# EAGLE board HPF (EAGLE 5.07)
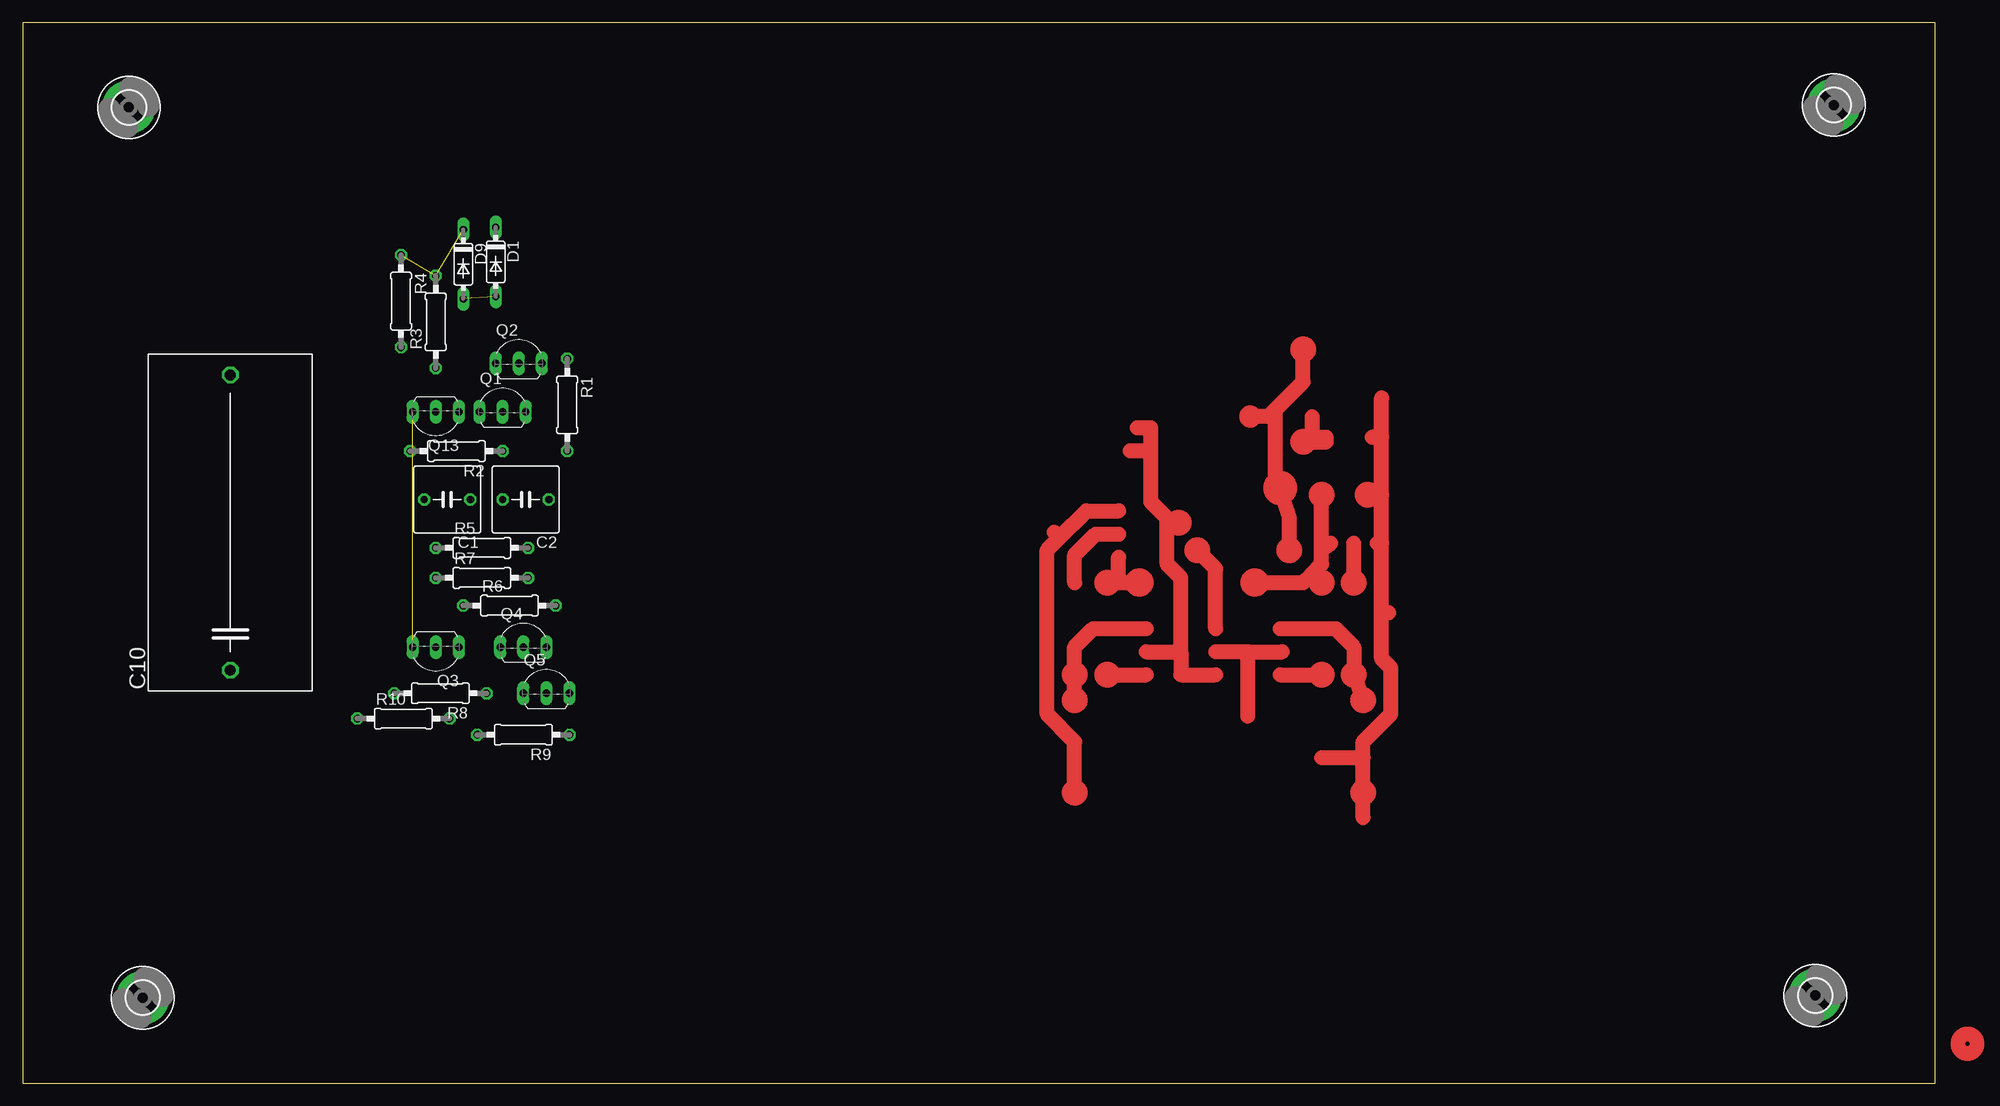
[diagram p0: board, top side]
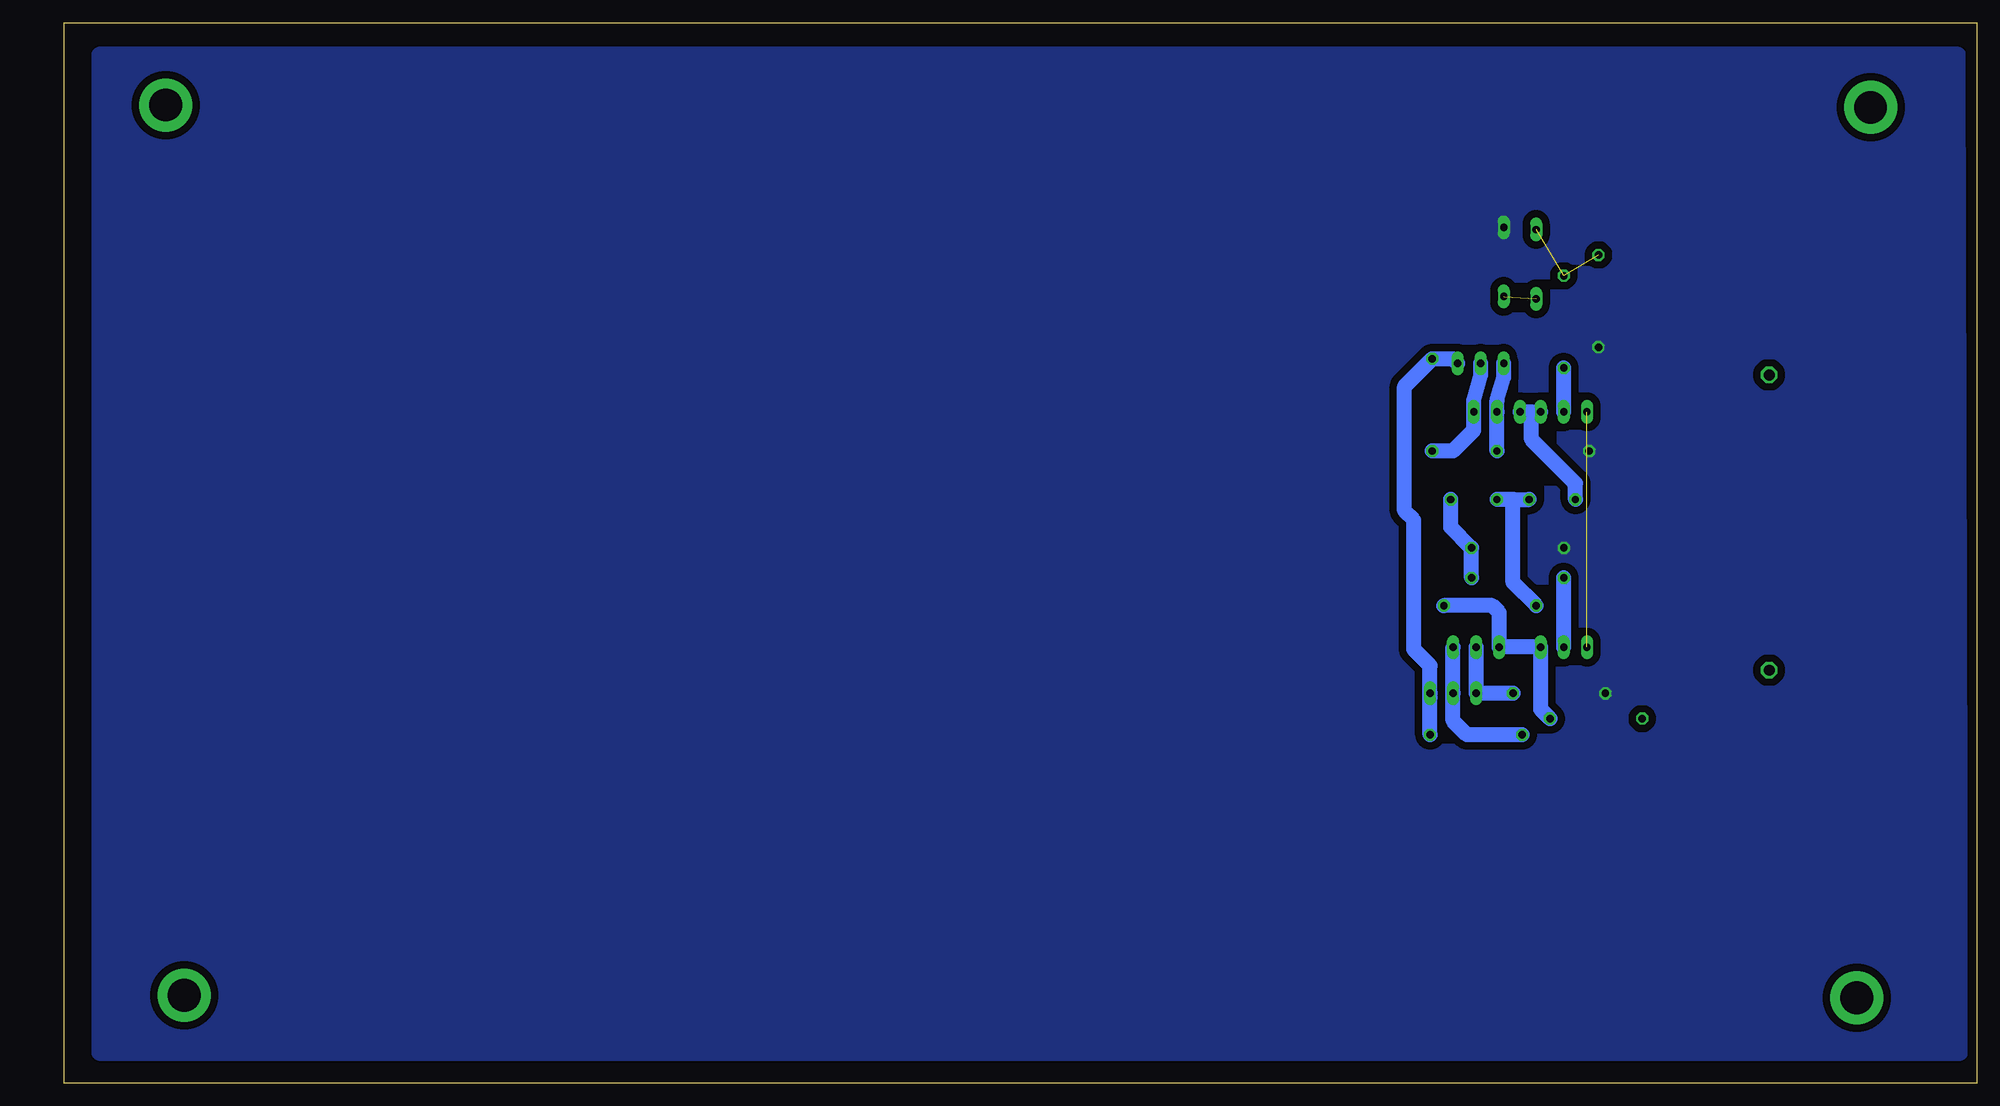
[diagram p1: board, bottom side, seen from below]

Size 210.55 x 116.76 mm. Coordinates in mm from the lower left corner, seen from the top.
Outline: 0,0 210.55,0 210.55,116.76 0,116.76 0,0
Copper layers (1*16): Top 0.035mm / dielectric 1.5mm / Bottom 0.035mm
Design rules "default *": minimum track width 10mil, minimum drill 24mil, track to track 8mil, track to pad 8mil, pad to pad 8mil, via to via 8mil, smd to smd 8mil, copper to edge 40mil, drill to drill 8mil, minimum pad ring 10mil, minimum via ring 8mil, stop-mask expansion 4mil, vias tented up to drill 0mil, thermal gap 10mil

## Footprints (pad centres in the part's own frame; a part is rotated, then mirrored left to right if it is on the bottom)
C050-075X075 = drill 0.813 octagon: 1 -2.54,0; 2 2.54,0
C325-182X374 = drill 1.194 octagon: 1 -16.256,0; 2 16.256,0
E5-10,5 = drill 1.016 pad 2.54 round: + -2.54,0 | drill 1.016 pad 2.54 octagon: - 2.54,0
DO35-7 = drill 0.813 long: A 3.81,0; C -3.81,0
3,6-PAD = drill 3.6 pad 5.842 round: B3,6 0,0
TO92-EBC = drill 0.813 long: B 0,-1.27; C -2.54,-1.27; E 2.54,-1.27
0207/10 = drill 0.813 octagon: 1 -5.08,0; 2 5.08,0
W237-132 = drill 1.194 long: 1 -2.54,-0.635; 2 2.54,-0.635

## Placement (x,y rotation side)
C1  47nF  [C050-075X075]  46.74,64.26 180 top
C2  47nF  [C050-075X075]  55.37,64.26 180 top
C10  7u5  [C325-182X374]  22.86,61.72 90 top
C16  100uF  [E5-10,5]  -12.95,-37.85 0 top  (outside the outline)
D1  9V1  [DO35-7]  52.07,90.42 270 top
D9  9V1  [DO35-7]  48.51,90.17 270 top
H1  MOUNT-PAD-ROUND3.6  [3,6-PAD]  13.21,9.4 0 top
H2  MOUNT-PAD-ROUND3.6  [3,6-PAD]  197.36,9.65 0 top
H3  MOUNT-PAD-ROUND3.6  [3,6-PAD]  11.68,107.44 0 top
H4  MOUNT-PAD-ROUND3.6  [3,6-PAD]  199.39,107.7 0 top
Q1  BC546  [TO92-EBC]  52.83,75.18 0 top
Q2  BC546  [TO92-EBC]  54.61,80.52 0 top
Q3  Z2106  [TO92-EBC]  45.47,46.74 180 top
Q4  BC546  [TO92-EBC]  55.12,49.28 0 top
Q5  BC546  [TO92-EBC]  57.66,44.2 0 top
Q13  Z2106  [TO92-EBC]  45.47,72.64 180 top
R1  100  [0207/10]  59.94,74.68 270 top
R2  3k3  [0207/10]  47.75,69.6 180 top
R3  200  [0207/10]  45.47,83.82 90 top
R4  200K  [0207/10]  41.66,86.11 270 top
R5  25K  [0207/10]  50.55,58.93 0 top
R6  25K  [0207/10]  53.59,52.58 0 top
R7  200  [0207/10]  50.55,55.63 0 top
R8  3k3  [0207/10]  45.97,42.93 180 top
R9  100  [0207/10]  55.12,38.35 180 top
R10  200  [0207/10]  41.91,40.13 0 top
R58  200  [0207/10]  -2.03,-13.72 0 top  (outside the outline)
X9  [W237-132]  -3.81,-26.42 0 top  (outside the outline)

## Library data of the parts
C1 C2 C10 C16 R1-R10 R58 = resistor
D1 D9 = diode
H1-H4 = holes
Q1-Q5 Q13 = transistor-npn
X9 = con-wago-508

## Nets
GNDA: D1.C R2.2 R4.2 R5.1 R8.2
N$1: Q1.E Q2.B R1.2
N$2: Q1.B Q2.C R2.1
N$3: C1.2 Q1.C Q13.C
N$4: Q2.E Q5.E R1.1 R9.1
N$5: Q3.E Q13.E
N$6: Q13.B R3.1
N$7: D1.A D9.A
N$8: D9.C R3.2 R4.1
N$9: C1.1 C2.2 R6.1
N$10: C2.1 R5.2 R7.2
N$11: Q3.B R7.1
N$12: Q3.C Q4.C R6.2 R10.2
N$13: Q4.E Q5.B R9.2
N$14: Q4.B Q5.C R8.1

## Tracks (layer width: path | path; a pad name or v marks a point on that pad's centre or on a via)
GNDA
  pour Bottom (isolate 0.813, no thermals): 1.78,3.3 1.78,10.92 2.03,113.28 206.76,113.28 206.76,3.3
N$1
  Bottom 1.676: Q2.B 54.61,77.98 55.37,75.18 55.37,74.93 Q1.E 55.37,71.88 57.66,69.6 R1.2
N$2
  Bottom 1.676: Q2.C 52.07,77.72 52.83,75.18 Q1.B R2.1
N$3
  Bottom 1.676: C1.2 44.2,66.04 49.02,70.87 49.02,73.91 | 49.02,73.91 48.51,73.91 Q13.C | 49.02,73.91 Q1.C
N$4
  Bottom 1.676: R9.1 60.2,42.42 Q5.E 60.2,45.97 61.98,47.75 61.98,61.98 62.99,62.99 62.99,76.71 R1.1 57.66,79.76 Q2.E
N$5  (1 unrouted)
N$6
  Bottom 1.676: Q13.B R3.1
N$7  (1 unrouted)
N$8  (2 unrouted)
N$9
  Bottom 1.676: 51.05,64.26 C2.2 | 51.05,64.26 C1.1 | R6.1 51.05,55.12 51.05,64.26
N$10
  Bottom 1.676: R7.2 R5.2 57.91,61.21 C2.1
N$11
  Bottom 1.676: Q3.B R7.1
N$12
  Bottom 1.676: R6.2 53.34,52.58 52.58,51.82 Q4.C Q3.C 48.01,41.15 R10.2
N$13
  Bottom 1.676: Q4.E Q5.B 57.66,39.88 56.13,38.35 R9.2
N$14
  Bottom 1.676: Q4.B Q5.C R8.1
N$33
  Top 1.676: 134.87,47.5 138.68,47.5 | 134.87,47.5 131.32,47.5 | 134.87,40.39 134.87,47.5
N$34
  Top 1.676: 127.51,47.5 127.51,44.96 131.32,44.96 | 127.51,47.5 127.51,55.63 125.98,57.15 125.98,61.72 | 123.7,47.5 127.51,47.5 | 125.98,61.72 125.98,62.23 124.21,64.01 124.21,69.6 | 125.98,61.72 127.25,61.72 | 124.21,69.6 121.92,69.6 | 122.68,72.14 124.21,72.14 124.21,69.6
N$35
  Top 1.676: 139.45,58.67 139.45,62.26 138.43,65.56 137.92,66.07 137.92,74.17 | 140.97,80.77 140.97,77.22 137.92,74.17 | 137.92,74.17 137.16,73.41 135.13,73.41
N$36
  Top 1.676: 147.57,42.16 146.56,44.96 146.56,48.01 144.53,50.04 138.43,50.04
N$37
  Top 1.676: 123.7,50.04 117.86,50.04 115.82,48.01 115.82,42.16
N$38
  Top 1.676: 120.65,55.12 122.94,55.12 | 120.65,55.12 119.38,55.12 | 120.65,55.12 120.65,57.91
N$39
  Top 1.676: 143,58.67 144.02,59.44 | 143,58.67 143,64.77 | 143,58.67 143,57.15 141.86,56.01 | 141.86,56.01 140.97,55.12 135.64,55.12 | 143,55.12 142.11,56.01 141.86,56.01
N$40
  Top 1.676: 120.65,62.99 117.09,62.99 114.17,60.07 | 113.58,60.66 | 114.17,60.07 113.58,60.66 | 114.17,60.07 112.78,58.67 112.78,40.64 115.82,37.59 115.82,32
N$41
  Top 1.676: 149.61,51.82 149.61,46.74 150.62,45.72 150.62,40.64 147.57,37.59 147.57,35.81 | 149.61,51.82 150.39,51.82 | 149.61,51.82 149.61,59.44 | 149.61,59.44 149.1,59.44 | 149.61,59.44 149.61,64.77 | 149.61,64.77 148.08,64.77 | 149.61,64.77 149.61,71.12 | 149.61,71.12 149.61,75.44 | 147.57,35.81 143,35.81 | 147.57,29.21 147.57,35.81 | 149.61,71.12 148.59,71.12
N$46
  Top 1.676: 141.94,73.36 141.99,73.32 141.99,70.61 | 141.99,70.61 140.97,70.61 | 141.99,70.61 143.51,70.61 143.51,70.87 143.26,71.12 143.51,71.12
N$47
  Top 1.676: 138.43,44.96 143,44.96
N$48
  Top 1.676: 146.56,55.12 146.56,59.44
N$49
  Top 1.676: 129.29,58.67 131.32,56.64 131.32,50.04
N$50
  Top 1.676: 119.38,44.96 123.7,44.96
N$51
  Top 1.676: 120.65,60.45 118.11,60.45 115.82,58.17 115.82,55.12
(copper drawn outside any net)
  shapes: Top area x3, Top circle x24